# Altium PCB led.PcbDoc
Units mm, origin at the board's own origin, x right, y up, seen from the top; angles counter-clockwise.
Board outline 20 x 20 mm, 2 copper layers (Top Layer, Bottom Layer), stack 1.671 mm thick; 5 components, 4 nets, 10 pads, 1 vias.
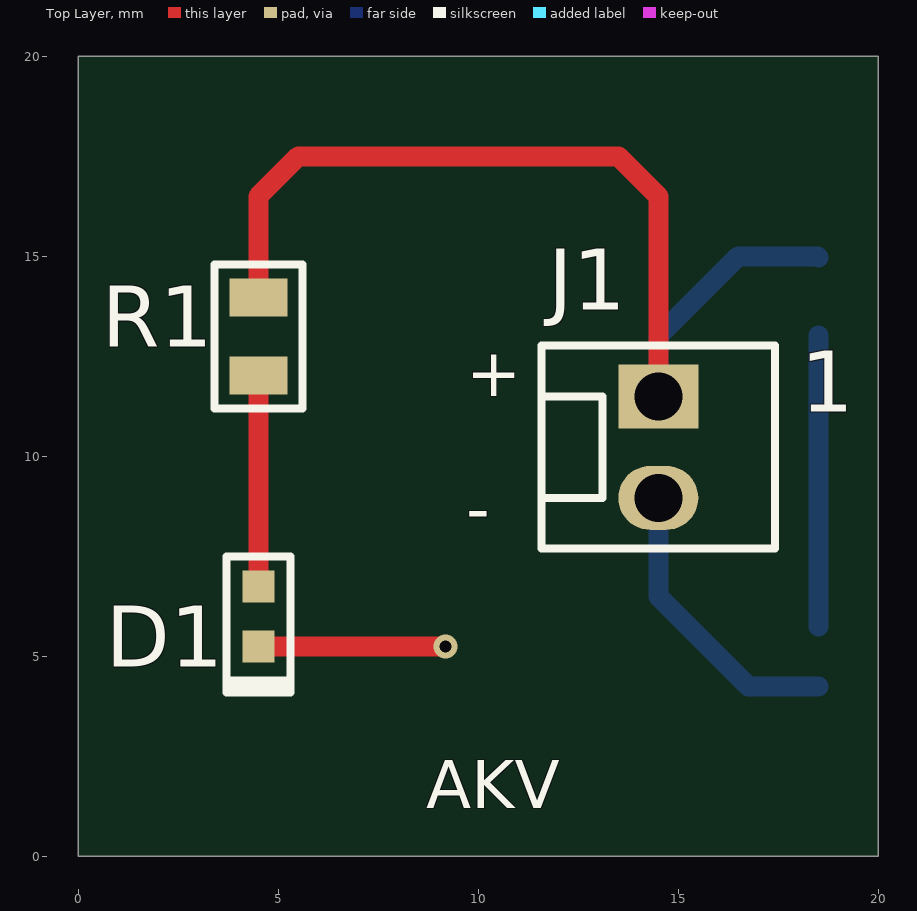
[diagram p0: Top Layer view]
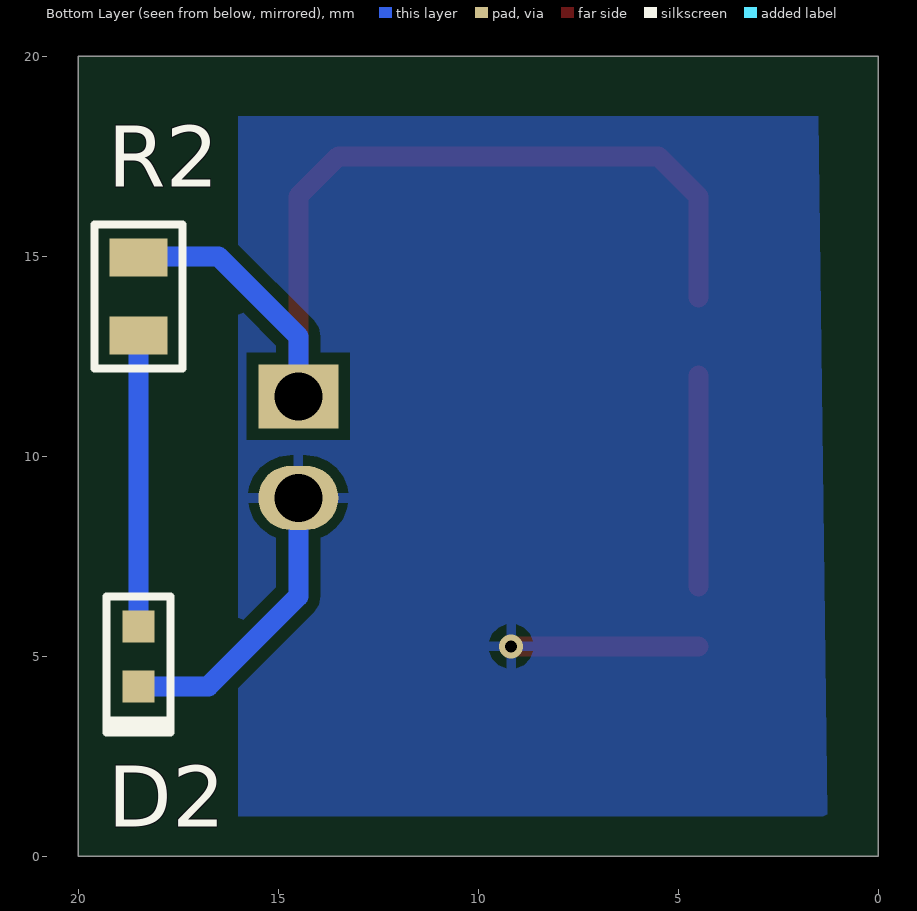
[diagram p1: Bottom Layer view, seen from below]
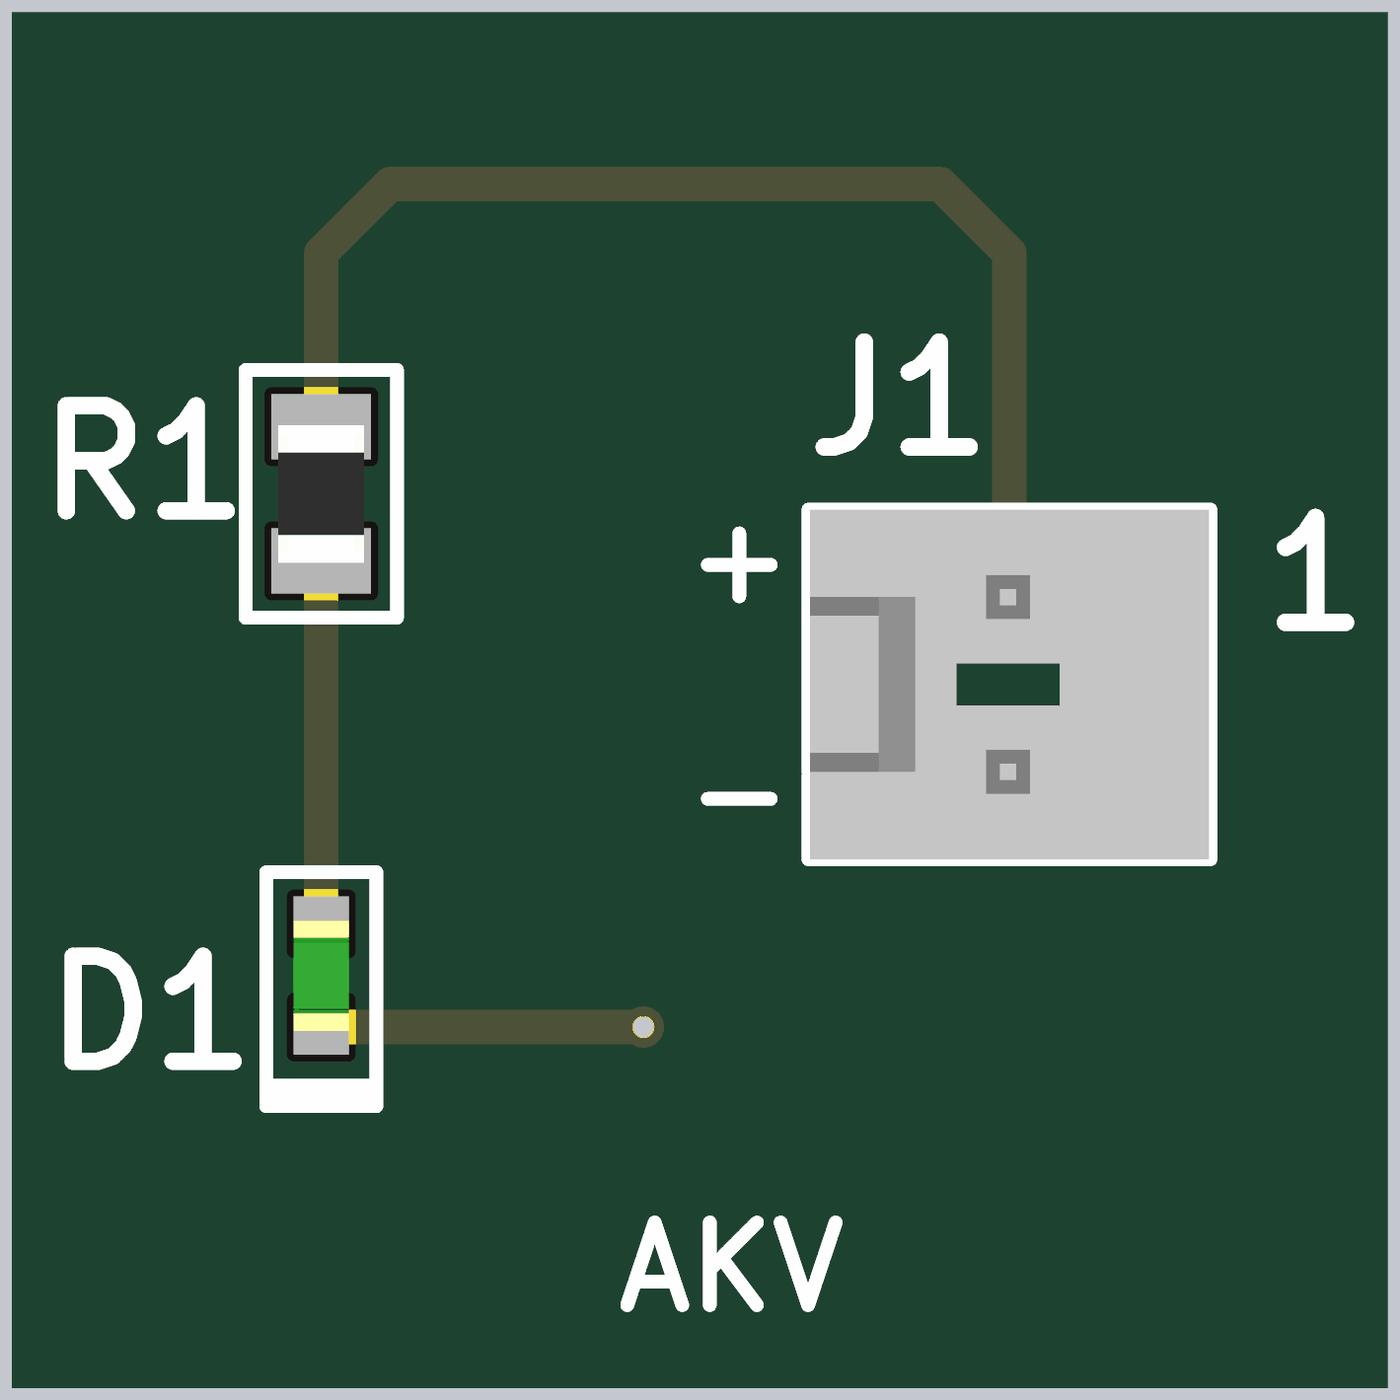
[diagram p2: 3D render of the assembled board from above, using the file's embedded part models]

## Layer stack, top to bottom
Top Solder: solder mask 0.0102, Solder Resist, Dk 3.5
Top Layer: signal copper 0.0356
Dielectric 1: dielectric 1.6, FR-4, Dk 4.8
Bottom Layer: signal copper 0.0356
Bottom Solder: solder mask 0.0102, Solder Resist, Dk 3.5

## Board outline
0,0 20,0 20,20 0,20

## Design rules (kind name [scope] priority, off if disabled: settings)
Clearance [All] p1: gap=0.3 ignorepadtopadclearanceinfootprint=FALSE
PolygonConnect [All] p1: connectstyle=Relief reliefconductorwidth=0.254 reliefentries=4 polygonreliefangle="90 Angle" airgapwidth=0.254
RoutingVias [All] p1: holewidth=0.3 width=0.6 viastyle="Through Hole" minholewidth=0.3 minwidth=0.6 maxholewidth=0.3 maxwidth=0.6
SilkToSolderMaskClearance [IsPad] p1: minsilkscreentomaskgap=0.1 clearancetoexposedcopper=TRUE
SolderMaskExpansion [All] p1: expansion=0.102 istentingtop=FALSE
Width [All] p1: maxlimit=1 minlimit=0.3 preferedwidth=0.5
29 further rules are at their usual default settings.

## Components (designator, comment, footprint, x,y, rotation, side; value= is the part's Value field where it differs from the comment)
D1 "GREEN" LED0603G 4.5,6 r90 top
D2 "GREEN" LED0603G 18.5,5 r90 bottom
J1 "1x2 header" HDR1X2 14.5,11.5 r0 top
R1 "360R" R0805 4.5,13 r270 top
R2 "360R" R0805 18.5,14 r270 bottom

## Footprints (in the part's own frame and the unit in brackets; to place one, negate y for a bottom-side part, rotate by r counter-clockwise, add the part's x,y. Pads: shape width x height; smd on the part's side, far side on the other; paste and mask are expansions set on the pad)
HDR1X2 [mm]
  rect 2x1.6 hole 1.2: 1(0,0)
  oval 2x1.6 hole 1.2: 2(0,-2.54)
  silkscreen extent -2.92,-3.81 2.92,1.27, body extent -2.9,-3.81 2.9,1.27, height 11.71
LED0603G [mm]
  rect 0.8x0.8 smd: 1(-0.75,0) 2(0.75,0)
  silkscreen extent -1.9,-0.8 1.5,0.8, body extent -0.8,-0.4 0.8,0.4, height 0.4
R0805 [mm]
  rect 0.95x1.45 smd: 1(-0.975,0) 2(0.975,0)
  silkscreen extent -1.8,-1.1 1.8,1.1, body extent -1,-0.63 1,0.63, height 0.61

## Part data
D1 D2: library part LTST-C193KGKT-5A, "Single Color LED, Green, Water Clear, 1.15mm", Color=Green, Forward Current=30mA, Manufacturer="Vishay Lite-On", Max Operating Temperature=85°C, Min Operating Temperature=-55°C, Supplier Part Number=160-1828-1-ND, Category=Optoelectronics, Channels=1, ComponentLink1Description=https://datasheet.ciiva.com:443/pdfs/VipMasterIC/IC/LITE/LITE-S-A0009748466/LITE-S-A0009831315-1.pdf?src-supplier=IHS+Markit, ComponentLink1URL=https://datasheet.ciiva.com:443/pdfs/VipMasterIC/IC/LITE/LITE-S-A0009748466/LITE-S-A0009831315-1.pdf?src-supplier=IHS+Markit, ComponentLink2Description=https://datasheet.ciiva.com/11773/0900766b80dc0550-11773612.pdf?src-supplier=Rs, ComponentLink2URL=https://datasheet.ciiva.com/11773/0900766b80dc0550-11773612.pdf?src-supplier=Rs, ComponentLink3Description=https://datasheet.ciiva.com/12400/ltst-c193-series-201756-12400795.pdf?src-supplier=Mouser, ComponentLink3URL=https://datasheet.ciiva.com/12400/ltst-c193-series-201756-12400795.pdf?src-supplier=Mouser, ComponentLink4Description=https://datasheet.ciiva.com/2110/s-110-ltst-c193kgkt-5a-2110268.pdf?src-supplier=Digi-Key, ComponentLink4URL=https://datasheet.ciiva.com/2110/s-110-ltst-c193kgkt-5a-2110268.pdf?src-supplier=Digi-Key, ComponentLink5Description=https://datasheet.ciiva.com/2110/s-110-ltst-c193kgkt-5a-2110267.pdf?src-supplier=Digi-Key, ComponentLink5URL=https://datasheet.ciiva.com/2110/s-110-ltst-c193kgkt-5a-2110267.pdf?src-supplier=Digi-Key, ComponentLink6Description=https://datasheet.ciiva.com/2110/s-110-ltst-c193kgkt-5a-2110269.pdf?src-supplier=Digi-Key, ComponentLink6URL=https://datasheet.ciiva.com/2110/s-110-ltst-c193kgkt-5a-2110269.pdf?src-supplier=Digi-Key, ComponentLink7Description=https://datasheet.ciiva.com/16444/ltst-c193kgkt-5a-16444759.pdf?src-supplier=Future+Electronics, ComponentLink7URL=https://datasheet.ciiva.com/16444/ltst-c193kgkt-5a-16444759.pdf?src-supplier=Future+Electronics, JESD-609 Code=e3, Lens Style="WATER CLEAR", Luminous Intensity-Nom=16.25mcd, Manufacturer Part Number=LTST-C193KGKT-5A, Mounting Technology="Surface Mount", Optoelectronic Device Type="SINGLE COLOR LED", Overall Height=0.35mm, Packaging="Tape and Reel", Pins=2, Pricing="1=0.37, 10=0.201, 100=0.0933, 500=0.08612, 1000=0.06745, 2000=0.06602 (USD)", Reach SVHC Compliant=Yes, RoHS=Yes, RoHS Compliant=Yes, Shape=Rectangular, Size=1.15mm, Stock=211088, Supplier=Digi-Key, Terminal Finish=Tin, Terminal Pitch=1.5mm, Viewing Angle=130°
J1: library part "0022292021 (2)", "Board Connector, 2 Contact(s), 1 Row(s), Male, Straight, Solder Terminal", Manufacturer=Molex, Manufacturer Part Number=0022292021, Supplier Part Number=WM2744-ND, Category=Connectors, Pricing="1=0.51, 10=0.427, 100=0.3324, 1000=0.26114, 5000=0.22949, 10000=0.21366 (USD)", RoHS=No, Stock=151179, Supplier=Digi-Key
R1 R2: library part CRCW0805360RFKEA, "Fixed Resistor, Metal Glaze/thick Film, 0.125W, 360ohm, 150V, 1% +/-Tol, 100ppm/Cel, Surface Mount, 0805", Case/Package=0805, Manufacturer=Vishay, Max Operating Temperature=155°C, Min Operating Temperature=-55°C, Package Height=0.45mm, Package Length=2mm, Package Shape=Rectangular, Package Style=SMTMeter, Package Width=1.25mm, Power=125mW, Rated Temperature=70°C, Resistor Type="FIXED RESISTOR", Supplier Part Number=541-360CCT-ND, Temperature Coefficient=100ppm/°C, Tolerance=1%, Working Voltage=150V, Category=Resistors, ComponentLink1Description=https://datasheet.ciiva.com:443/pdfs/VipMasterIC/IC/VISH/VISH-S-A0007266705/VISH-S-A0007266705-1.pdf?src-supplier=IHS+Markit, ComponentLink1URL=https://datasheet.ciiva.com:443/pdfs/VipMasterIC/IC/VISH/VISH-S-A0007266705/VISH-S-A0007266705-1.pdf?src-supplier=IHS+Markit, ComponentLink2Description=https://datasheet.ciiva.com/2467/dcrcwe3-2467773.pdf?src-supplier=Digi-Key, ComponentLink2URL=https://datasheet.ciiva.com/2467/dcrcwe3-2467773.pdf?src-supplier=Digi-Key, Construction=Chip, JESD-609 Code=e3, Manufacturer Part Number=CRCW0805360RFKEA, Mounting Technology="Surface Mount", Packaging="Tape and Reel", Pins=2, Pricing="1=0.1, 10=0.038, 50=0.0244, 100=0.0206, 500=0.01434, 1000=0.01248 (USD)", Reach SVHC Compliant=Yes, Reference Standard=AEC-Q200, RoHS=Yes, RoHS Compliant=Yes, Stock=29636, Supplier=Digi-Key, Technology="METAL GLAZE/THICK FILM", Terminal Finish=Nickel, Termination=Wraparound

## Via types
v1: diameter 0.6, hole 0.3, Top Layer to Bottom Layer, tented both sides, 1 vias

## Nets (pads, with @x,y where several pads share a name; then routed paths per layer and width w, separated by ;. In a path a pad name is that pad's centre, name@x,y a point inside that pad or via, vN(x,y) a via of type N, cw(c..) or ccw(c..) an arc to the next point about the centre after c; other vN are vias at no path point)
+3V3: J1.1 R1.1 R2.1 | length 24.7
  Top Layer w0.5: R1.1 4.5,16.5 5.5,17.5 13.5,17.5 14.5,16.5 J1.1
  Bottom Layer w0.5: J1.1 14.5,13 16.5,15 18.475,15 R2.1
DIODE1: D1.2 R1.2 | length 5.3
  Top Layer w0.5: D1.2 R1.2
DIODE2: D2.2 R2.2 | length 7.3
  Bottom Layer w0.5: D2.2 R2.2
GND: D1.1 D2.1 J1.2 | length 12.3
  Top Layer w0.5: D1.1 v1(9.181,5.25) v1@9.19,5.24 ; J1.2@14.3,8.96 J1.2
  Bottom Layer w0.5: J1.2 14.5,6.5 16.75,4.25 D2.1

## Polygon pours and split planes (outlines as drawn)
GND on Bottom Layer "GND_L02_P000" (solid, pour order 0): 1.27,0.88 1.391,1 16,1 16,18.5 1.5,18.5

## Silkscreen, mask and mechanical layers (free items; w line width, h text height)
Top Overlay:
  text "+" at 9.7,11.5 h1.2
  text "-" at 9.7,8.1 h1.2
  text "AKV" at 8.7,1.2 h1.2
board outline:
  the board outline again, w0.1

## Text inside footprints (layer, text, board x,y; h text height)
J1: Top Overlay "1" at 18.056,11.119 h1.52